# EAGLE board stencil-helper (EAGLE 6.5.0)
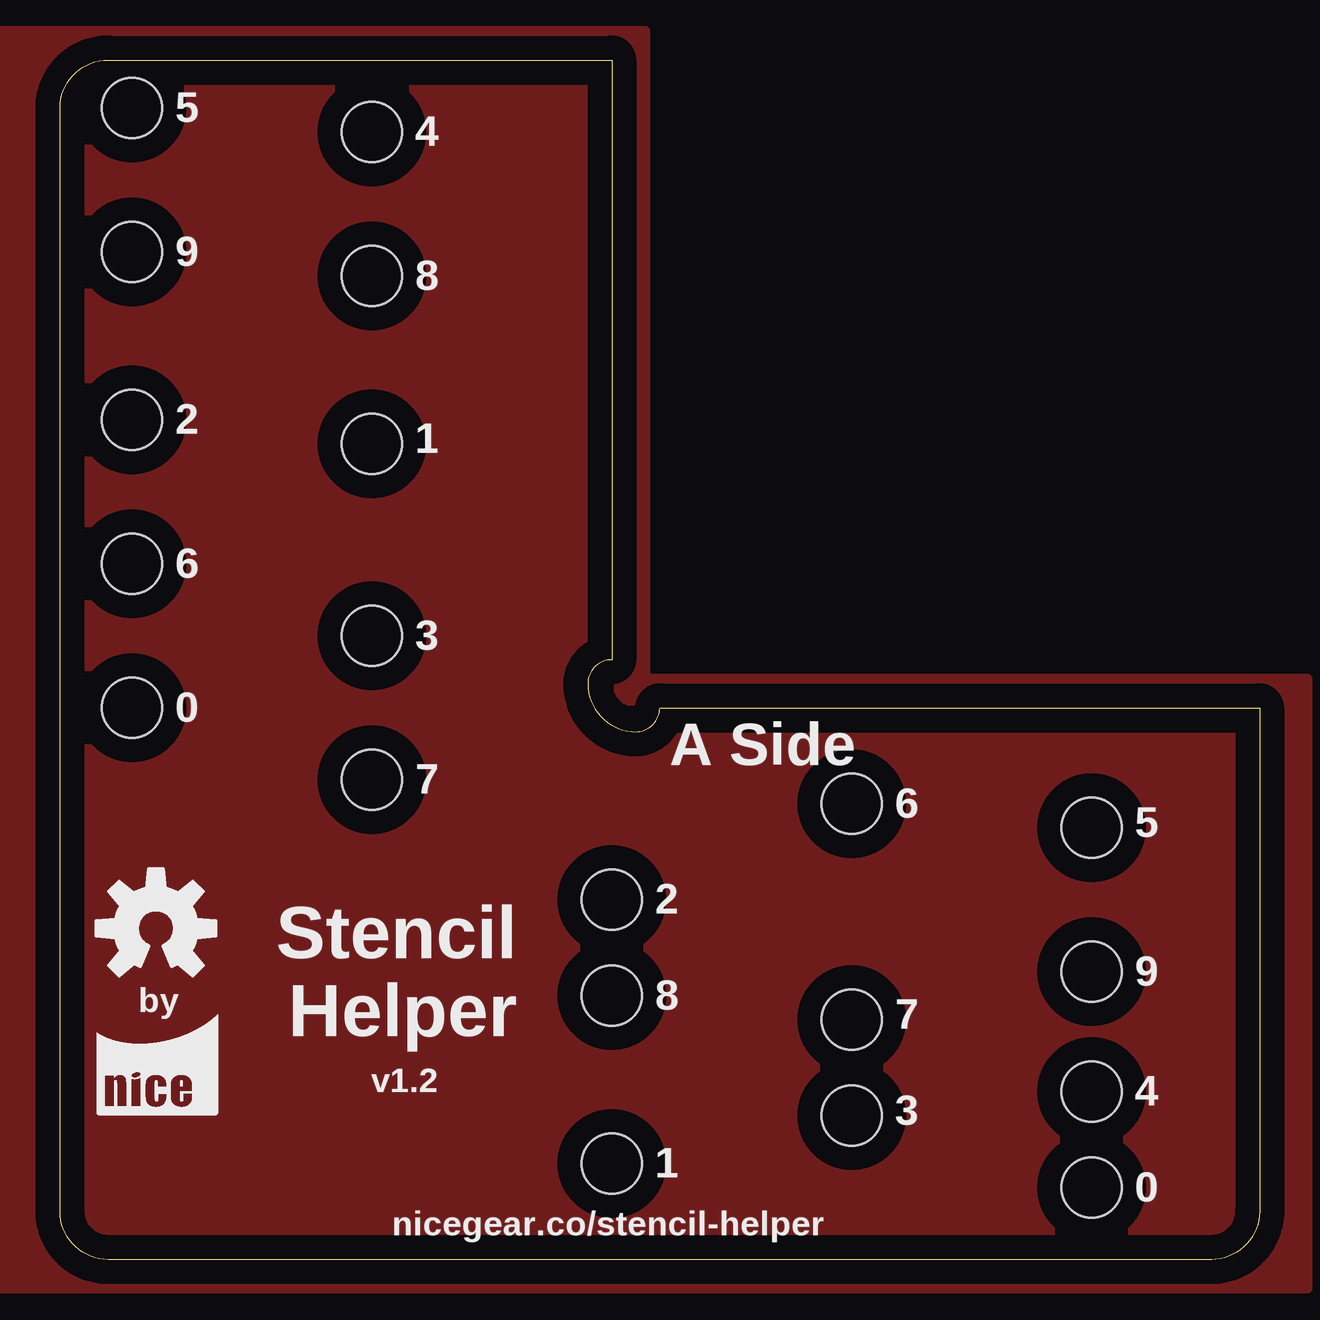
[diagram p0: board, top side]
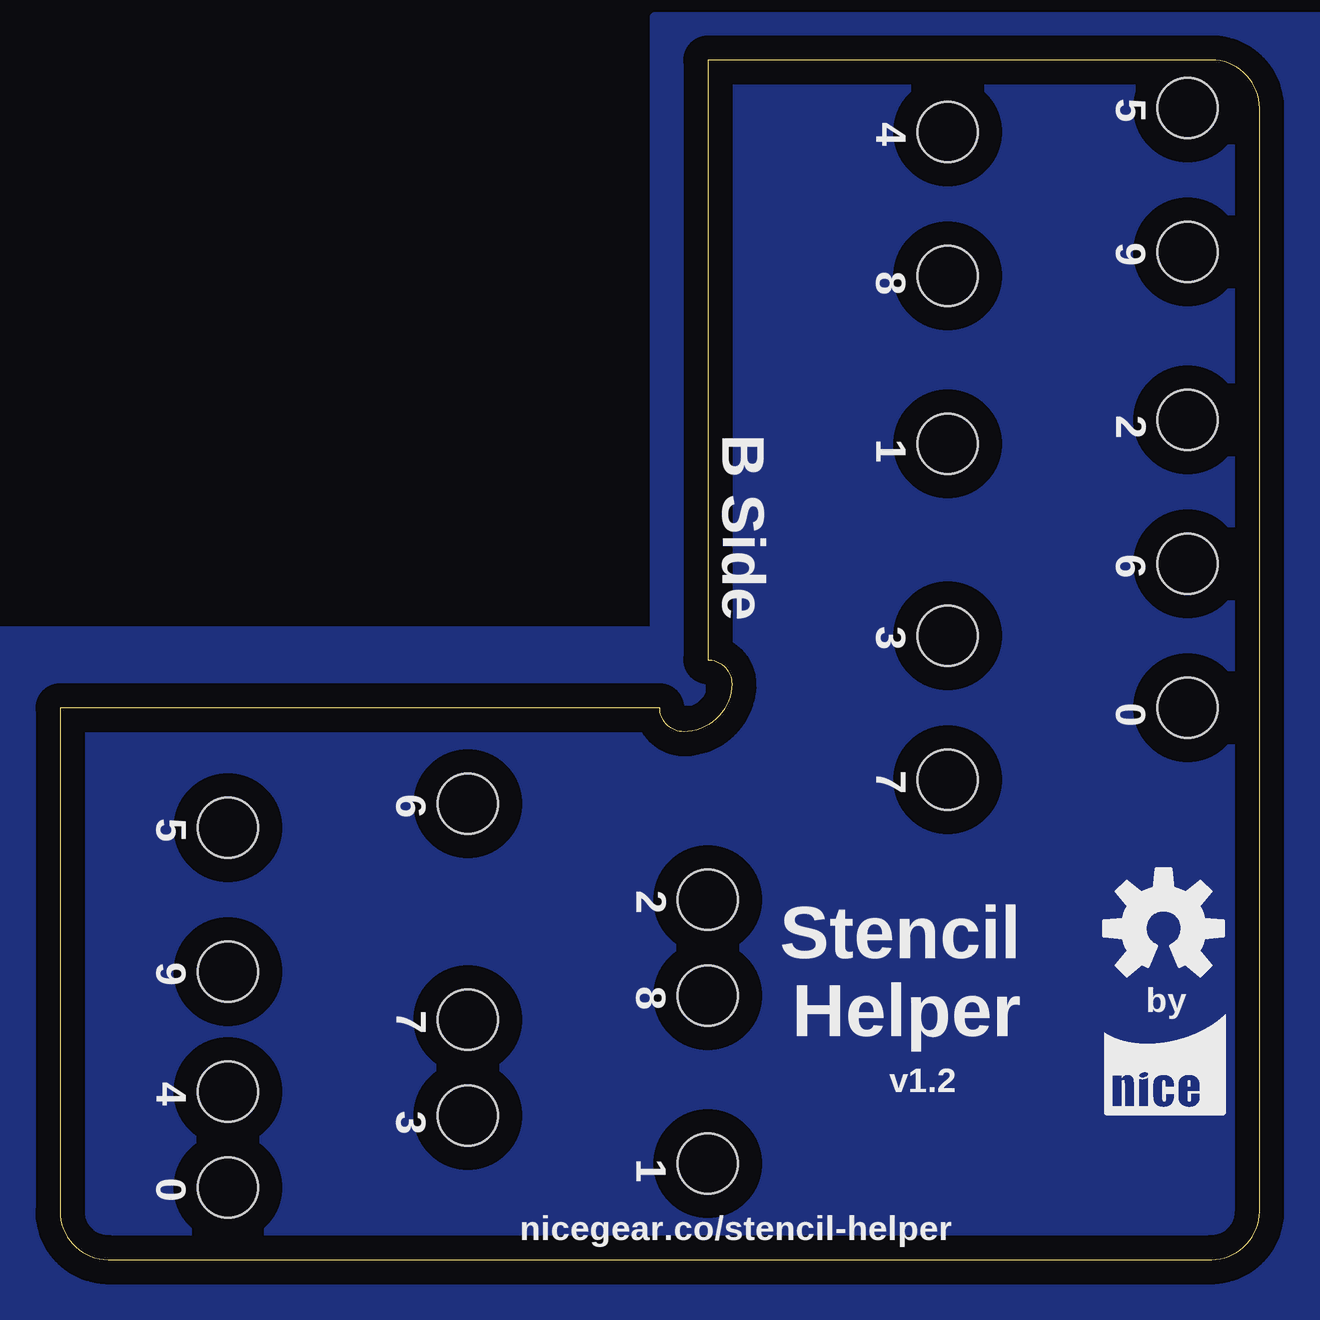
[diagram p1: board, bottom side, seen from below]

Size 50 x 50 mm. Coordinates in mm from the lower left corner, seen from the top.
Outline: 50,23 50,2 arc-90 48,0 2,0 arc-90 0,2 0,48 arc-90 2,50 23,50 23,25 arc90 22,24 arc90 24,22 arc90 25,23 50,23
Copper layers (1*16): Top 0.035mm / dielectric 1.5mm / Bottom 0.035mm
Design rules "default": minimum track width 10mil, minimum drill 24mil, track to track 8mil, track to pad 8mil, pad to pad 8mil, via to via 8mil, smd to smd 8mil, copper to edge 40mil, drill to drill 8mil, minimum pad ring 10mil, minimum via ring 8mil, stop-mask expansion 4mil, vias tented up to drill 0mil, thermal gap 10mil
Holes 2.5 mm at 43,18 23,11 13,26 33,10 43,7 43,12 33,19 23,15 3,48 13,47 3,42 3,35 33,6 3,29 13,20 23,4 3,23 13,41 13,34 43,3

## Placement (x,y rotation side)
E$1  [NICE-LOGO-05]  1.98,6.75 0 top
E$2  [OSHW-LOGO-M]  4,13.8 0 top
E$3  [NICE-LOGO-05]  6.02,6.75 0 bottom
E$4  [OSHW-LOGO-M]  4,13.8 0 bottom

## Library data of the parts
E$1 E$3 = nice
E$2 E$4 = SparkFun-Aesthetics

## Tracks (layer width: path | path; a pad name or v marks a point on that pad's centre or on a via)
S$1
  pour Top: -2.6,51.2 -2.6,-1.2 52,-1.2 52,24.2 24.4,24.2 24.4,51.2
S$2
  pour Bottom: -3.4,51.8 -3.8,51.8 -3.8,-2.8 56,-2.8 56,26.2 25.2,26.2 25.2,51.8

## Text on the board
tPlace: 5 | 4 | 9 | 8 | 2 | 1 | 6 | 3 | 0 | A Side | 7 | 6 | 5 | 2 | Stencil | 9 | by | 8 | 7 | Helper | v1.2 | 3 | 4 | 1 | 0 | nicegear.co/stencil-helper
bPlace: 5 | 4 | 9 | 8 | 2 | 1 | B Side | 6 | 3 | 0 | 7 | 6 | 5 | 2 | Stencil | 9 | 8 | by | 7 | Helper | v1.2 | 4 | 3 | 1 | 0 | nicegear.co/stencil-helper